# Altium PCB PCB_CONTROL.PcbDoc (part 7 of 15)
Units mil, origin at the board's own origin, x right, y up, seen from the top; angles counter-clockwise.
Board outline 7360.03 x 4773.15 mil, 2 copper layers (Top Layer, Bottom Layer); 73 components, 135 nets, 396 pads, 106 vias.
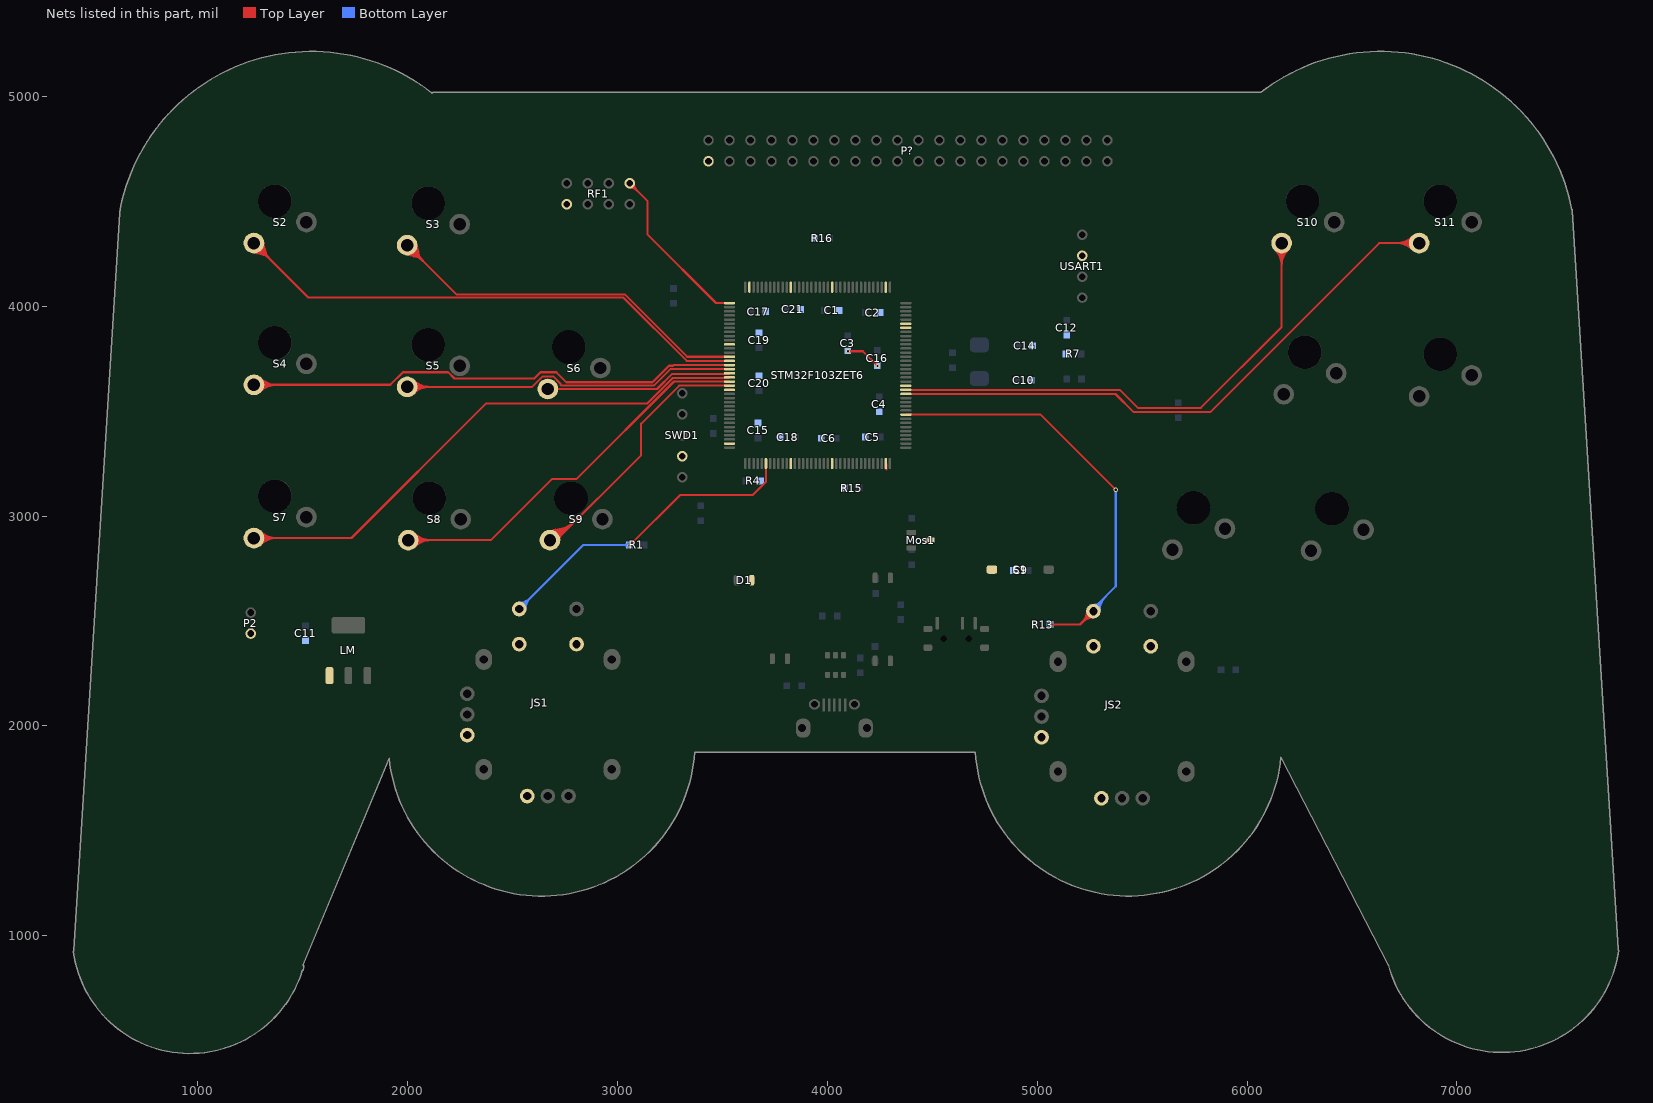
[diagram p7: the nets of this part, all layers, seen from the top]

## Via types
v1: diameter 20, hole 10, Top Layer to Bottom Layer, 104 vias
v2: diameter 30, hole 20, Top Layer to Bottom Layer, 2 vias

## Nets (pads, with @x,y where several pads share a name; then routed paths per layer and width w, separated by ;. In a path a pad name is that pad's centre, name@x,y a point inside that pad or via, vN(x,y) a via of type N, cw(c..) or ccw(c..) an arc to the next point about the centre after c; other vN are vias at no path point) (continued)
GND: C1.2 C2.2 C3.2 C4.2 C5.2 C6.2 C9.2 C10.1 C11.1 C12.1 C14.1 C15.2 C16.2 C17.2 C18.2 C19.2 C20.2 C21.2 D1.2 JS1.3 JS1.4 JS1.8 JS1.10 JS2.3 JS2.4 JS2.8 JS2.10 LM.1 Mos1.D P2.1 P?.1 R4.2 R7.1 R15.2 R16.2 RF1.1 S1.2 STM32F103ZET6.16 STM32F103ZET6.30 STM32F103ZET6.31 STM32F103ZET6.38 STM32F103ZET6.51 STM32F103ZET6.61 STM32F103ZET6.71 STM32F103ZET6.83 STM32F103ZET6.94 STM32F103ZET6.107 STM32F103ZET6.120 STM32F103ZET6.130 STM32F103ZET6.143 SWD1.4 USART1.2 | length 450.2
  Top Layer w10: v1(4100,3785) 4170,3785 v1(4240,3715) ; STM32F103ZET6.143@4279.8,3250 4282.49,3247.32 4282.49,3221.96 ; v1@4103.54,3781.46 cw(c4112.07,3772.93) 4112.07,3785 ; v1@4103.54,3781.46 cw(c4112.07,3772.93) 4112.07,3785 ; v1@4103.54,3781.46 cw(c4112.07,3772.93) 4112.07,3785 ; v1@4103.54,3781.46 cw(c4112.07,3772.93) 4112.07,3785 ; v1@4103.54,3788.54 ccw(c4112.07,3797.07) 4112.07,3785 ; v1@4103.54,3788.54 ccw(c4112.07,3797.07) 4112.07,3785 ; v1@4103.54,3788.54 ccw(c4112.07,3797.07) 4112.07,3785 ; v1@4103.54,3788.54 ccw(c4112.07,3797.07) 4112.07,3785 ; 4231.46,3723.54 cw(c4222.93,3715) v1@4235,3715 ; 4231.46,3723.54 ccw(c4240,3732.07) v1@4240,3720 ; 4231.46,3723.54 ccw(c4240,3732.07) v1@4240,3720 ; 4231.46,3723.54 cw(c4222.93,3715) v1@4235,3715 ; 4231.46,3723.54 ccw(c4240,3732.07) v1@4240,3720 ; 4231.46,3723.54 cw(c4222.93,3715) v1@4235,3715 ; 4231.46,3723.54 ccw(c4240,3732.07) v1@4240,3720 ; 4231.46,3723.54 cw(c4222.93,3715) v1@4235,3715 ; STM32F103ZET6.143@4279.19,3228.21 cw(c4273.94,3221.46) 4282.49,3221.46 ; STM32F103ZET6.143@4279.19,3228.21 cw(c4273.94,3221.46) 4282.49,3221.46 ; STM32F103ZET6.143@4279.19,3228.21 cw(c4273.94,3221.46) 4282.49,3221.46 ; STM32F103ZET6.143@4279.19,3228.21 cw(c4273.94,3221.46) 4282.49,3221.46 ; STM32F103ZET6.143@4279.19,3228.21 cw(c4273.94,3221.46) 4282.49,3221.46 ; STM32F103ZET6.143@4279.19,3228.21 cw(c4273.94,3221.46) 4282.49,3221.46 ; STM32F103ZET6.143@4279.19,3228.21 cw(c4273.94,3221.46) 4282.49,3221.46 ; STM32F103ZET6.143@4279.19,3228.21 cw(c4273.94,3221.46) 4282.49,3221.46 ; STM32F103ZET6.143@4279.19,3228.21 cw(c4273.94,3221.46) 4282.49,3221.46 ; STM32F103ZET6.143@4279.19,3228.21 cw(c4273.94,3221.46) 4282.49,3221.46 ; STM32F103ZET6.143@4279.8,3229 4282.49,3221.96 ; STM32F103ZET6.143@4279.8,3229 4282.49,3221.96 ; STM32F103ZET6.143@4279.8,3229 4282.49,3221.96
IRQ: RF1.8 STM32F103ZET6.73 | length 1572.8
  Top Layer w10: STM32F103ZET6.73@3535,4014.49 3470.51,4014.49 3145,4340 3145,4500 RF1.8@3060,4585 ; RF1.8@3060,4565 cw(c3060,4516.72) 3094.14,4550.86 ; RF1.8@3060,4565 cw(c3060,4516.72) 3094.14,4550.86 ; RF1.8@3060,4565 cw(c3060,4516.72) 3094.14,4550.86 ; RF1.8@3060,4565 cw(c3060,4516.72) 3094.14,4550.86 ; RF1.8@3060,4585 ccw(c3094.24,4592.01) 3085.2,4558.25 ; RF1.8@3060,4585 cw(c3052.99,4550.76) 3086.75,4559.8 ; RF1.8@3060,4585 ccw(c3094.24,4592.01) 3085.2,4558.25 ; RF1.8@3060,4585 cw(c3052.99,4550.76) 3086.75,4559.8 ; RF1.8@3060,4585 ccw(c3094.24,4592.01) 3085.2,4558.25 ; RF1.8@3060,4585 cw(c3052.99,4550.76) 3086.75,4559.8 ; RF1.8@3060,4585 ccw(c3094.24,4592.01) 3085.2,4558.25 ; RF1.8@3060,4585 cw(c3052.99,4550.76) 3086.75,4559.8 ; RF1.8@3060,4585 ccw(c3094.24,4592.01) 3085.2,4558.25 ; RF1.8@3060,4585 cw(c3052.99,4550.76) 3086.75,4559.8 ; RF1.8@3060,4585 ccw(c3094.24,4592.01) 3085.2,4558.25 ; RF1.8@3060,4585 cw(c3052.99,4550.76) 3086.75,4559.8 ; RF1.8@3080,4585 ccw(c3128.28,4585) 3094.14,4550.86 ; RF1.8@3080,4585 ccw(c3128.28,4585) 3094.14,4550.86 ; RF1.8@3080,4585 ccw(c3128.28,4585) 3094.14,4550.86 ; RF1.8@3080,4585 ccw(c3128.28,4585) 3094.14,4550.86
JOY_LEFT_KEY: JS2.9 R13.1 STM32F103ZET6.9 | length 2464
  Top Layer w10: STM32F103ZET6.9@4375,3482.99 5017.01,3482.99 v1(5375,3125) ; v1(5062,2483) 5204.46,2483 JS2.9@5268.43,2546.97 ; v1@5065.54,2479.46 cw(c5074.07,2470.93) 5074.07,2483 cw(c5074.07,2495.07) v1@5065.54,2486.54 ; JS2.9@5238.43,2546.97 cw(c5166,2546.97) 5217.21,2495.76 cw(c5268.43,2444.54) JS2.9@5268.43,2516.97 ; JS2.9@5248.43,2546.97 cw(c5200.14,2546.97) 5234.28,2512.83 cw(c5268.43,2478.68) JS2.9@5268.43,2526.97 ; v1@5370,3125 ccw(c5357.93,3125) 5366.46,3133.54 ccw(c5375,3142.07) v1@5375,3130
  Bottom Layer w10: JS2.9@5268.43,2546.97 5268.43,2558.43 5375,2665 v1(5375,3125) ; JS2.9@5268.43,2576.97 ccw(c5268.43,2621.74) 5300.08,2590.08 ; JS2.9@5278.43,2546.97 cw(c5330.23,2546.97) 5293.6,2583.6 ; JS2.9@5288.43,2546.97 cw(c5364.37,2546.97) 5310.67,2600.67 ; JS2.9@5298.43,2546.97 cw(c5398.51,2546.97) 5327.74,2617.74 ; v1@5371.46,3121.46 cw(c5362.93,3112.93) 5375,3112.93 cw(c5387.07,3112.93) v1@5378.54,3121.46
JOY_RIGHT_KEY: JS1.9 R1.1 STM32F103ZET6.114 | length 1776.9
  Top Layer w10: v1(3060,2860) 3300,3100 3645,3100 3708.94,3163.94 STM32F103ZET6.114@3708.94,3250 ; v1@3060,2865 ccw(c3060,2877.07) 3068.54,2868.54 ccw(c3077.07,2860) v1@3065,2860
  Bottom Layer w10: JS1.9@2533.43,2556.97 2838.46,2862 R1.1@3058,2862 ; JS1.9@2533.43,2576.97 ccw(c2533.43,2625.25) 2567.57,2591.11 ccw(c2601.71,2556.97) JS1.9@2553.43,2556.97 ; JS1.9@2533.43,2586.97 ccw(c2533.43,2659.39) 2584.64,2608.18 ccw(c2635.85,2556.97) JS1.9@2563.43,2556.97 ; R1.1@3043.1,2862 cw(c3043.1,2843.1) R1.1@3056.46,2856.46 ; R1.1@3050.22,2854.22 ccw(c3031.44,2835.44) 3031.44,2862 ccw(c3031.44,2888.56) R1.1@3050.22,2869.78
KEY_1: S2.2 STM32F103ZET6.87 | length 8074.4
  Top Layer w10: S2.2@1270,4300 1530,4040 3030,4040 3331.1,3738.9 STM32F103ZET6.87@3535,3738.9 ; S2.2@1244.74,4294.83 ccw(c1299.99,4306.14) 1285.39,4251.66 ; S2.2@1244.74,4294.83 ccw(c1299.99,4306.14) 1285.39,4251.66 ; S2.2@1244.74,4294.83 ccw(c1299.99,4306.14) 1285.39,4251.66 ; S2.2@1244.74,4294.83 ccw(c1299.99,4306.14) 1285.39,4251.66 ; S2.2@1244.74,4294.83 ccw(c1299.99,4306.14) 1285.39,4251.66 ; S2.2@1244.74,4294.83 ccw(c1299.99,4306.14) 1285.39,4251.66 ; S2.2@1254.53,4296.83 ccw(c1317.72,4309.77) 1301.02,4247.47 ; S2.2@1254.53,4296.83 ccw(c1317.72,4309.77) 1301.02,4247.47 ; S2.2@1254.53,4296.83 ccw(c1317.72,4309.77) 1301.02,4247.47 ; S2.2@1254.53,4296.83 ccw(c1317.72,4309.77) 1301.02,4247.47 ; S2.2@1254.53,4296.83 ccw(c1317.72,4309.77) 1301.02,4247.47 ; S2.2@1254.53,4296.83 ccw(c1317.72,4309.77) 1301.02,4247.47 ; S2.2@1264.23,4299.57 ccw(c1310.57,4303.03) 1298.54,4258.14 ; S2.2@1264.23,4299.57 ccw(c1310.57,4303.03) 1298.54,4258.14 ; S2.2@1264.23,4299.57 ccw(c1310.57,4303.03) 1298.54,4258.14 ; S2.2@1264.23,4299.57 ccw(c1310.57,4303.03) 1298.54,4258.14 ; S2.2@1264.23,4299.57 ccw(c1310.57,4303.03) 1298.54,4258.14 ; S2.2@1264.23,4299.57 ccw(c1310.57,4303.03) 1298.54,4258.14 ; S2.2@1264.33,4298.84 ccw(c1335.44,4313.4) 1316.66,4243.29 ; S2.2@1264.33,4298.84 ccw(c1335.44,4313.4) 1316.66,4243.29 ; S2.2@1264.33,4298.84 ccw(c1335.44,4313.4) 1316.66,4243.29 ; S2.2@1264.33,4298.84 ccw(c1335.44,4313.4) 1316.66,4243.29 ; S2.2@1264.33,4298.84 ccw(c1335.44,4313.4) 1316.66,4243.29 ; S2.2@1264.33,4298.84 ccw(c1335.44,4313.4) 1316.66,4243.29 ; S2.2@1269.69,4295.8 cw(c1265.86,4244.55) 1315.51,4257.85 ; S2.2@1269.69,4295.8 cw(c1265.86,4244.55) 1315.51,4257.85 ; S2.2@1269.69,4295.8 cw(c1265.86,4244.55) 1315.51,4257.85 ; S2.2@1269.69,4295.8 cw(c1265.86,4244.55) 1315.51,4257.85 ; S2.2@1269.69,4295.8 cw(c1265.86,4244.55) 1315.51,4257.85 ; S2.2@1269.69,4295.8 cw(c1265.86,4244.55) 1315.51,4257.85 ; S2.2@1270,4255.79 cw(c1270,4149.05) 1345.48,4224.52 ; S2.2@1270,4255.79 cw(c1270,4149.05) 1345.48,4224.52 ; S2.2@1270,4255.79 cw(c1270,4149.05) 1345.48,4224.52 ; S2.2@1270,4255.79 cw(c1270,4149.05) 1345.48,4224.52 ; S2.2@1270,4265.79 cw(c1270,4183.19) 1328.4,4241.6 ; S2.2@1270,4265.79 cw(c1270,4183.19) 1328.4,4241.6 ; S2.2@1270,4265.79 cw(c1270,4183.19) 1328.4,4241.6 ; S2.2@1270,4265.79 cw(c1270,4183.19) 1328.4,4241.6 ; S2.2@1270,4275.79 cw(c1270,4217.33) 1311.33,4258.67 ; S2.2@1270,4275.79 cw(c1270,4217.33) 1311.33,4258.67 ; S2.2@1270,4275.79 cw(c1270,4217.33) 1311.33,4258.67 ; S2.2@1270,4275.79 cw(c1270,4217.33) 1311.33,4258.67 ; S2.2@1270.43,4305.77 cw(c1266.97,4259.43) 1311.86,4271.46 ; S2.2@1270.43,4305.77 cw(c1266.97,4259.43) 1311.86,4271.46 ; S2.2@1270.43,4305.77 cw(c1266.97,4259.43) 1311.86,4271.46 ; S2.2@1270.43,4305.77 cw(c1266.97,4259.43) 1311.86,4271.46 ; S2.2@1270.43,4305.77 cw(c1266.97,4259.43) 1311.86,4271.46 ; S2.2@1270.43,4305.77 cw(c1266.97,4259.43) 1311.86,4271.46 ; S2.2@1271.16,4305.67 cw(c1256.6,4234.56) 1326.71,4253.34 ; S2.2@1271.16,4305.67 cw(c1256.6,4234.56) 1326.71,4253.34 ; S2.2@1271.16,4305.67 cw(c1256.6,4234.56) 1326.71,4253.34 ; S2.2@1271.16,4305.67 cw(c1256.6,4234.56) 1326.71,4253.34 ; S2.2@1271.16,4305.67 cw(c1256.6,4234.56) 1326.71,4253.34 ; S2.2@1271.16,4305.67 cw(c1256.6,4234.56) 1326.71,4253.34 ; S2.2@1273.17,4315.47 cw(c1260.23,4252.28) 1322.53,4268.98 ; S2.2@1273.17,4315.47 cw(c1260.23,4252.28) 1322.53,4268.98 ; S2.2@1273.17,4315.47 cw(c1260.23,4252.28) 1322.53,4268.98 ; S2.2@1273.17,4315.47 cw(c1260.23,4252.28) 1322.53,4268.98 ; S2.2@1273.17,4315.47 cw(c1260.23,4252.28) 1322.53,4268.98 ; S2.2@1273.17,4315.47 cw(c1260.23,4252.28) 1322.53,4268.98 ; S2.2@1274.2,4300.31 ccw(c1325.45,4304.14) 1312.15,4254.49 ; S2.2@1274.2,4300.31 ccw(c1325.45,4304.14) 1312.15,4254.49 ; S2.2@1274.2,4300.31 ccw(c1325.45,4304.14) 1312.15,4254.49 ; S2.2@1274.2,4300.31 ccw(c1325.45,4304.14) 1312.15,4254.49 ; S2.2@1274.2,4300.31 ccw(c1325.45,4304.14) 1312.15,4254.49 ; S2.2@1274.2,4300.31 ccw(c1325.45,4304.14) 1312.15,4254.49 ; S2.2@1275.17,4325.26 cw(c1263.86,4270.01) 1318.34,4284.61 ; S2.2@1275.17,4325.26 cw(c1263.86,4270.01) 1318.34,4284.61 ; S2.2@1275.17,4325.26 cw(c1263.86,4270.01) 1318.34,4284.61 ; S2.2@1275.17,4325.26 cw(c1263.86,4270.01) 1318.34,4284.61 ; S2.2@1275.17,4325.26 cw(c1263.86,4270.01) 1318.34,4284.61 ; S2.2@1275.17,4325.26 cw(c1263.86,4270.01) 1318.34,4284.61 ; S2.2@1294.21,4300 ccw(c1352.67,4300) 1311.33,4258.67 ; S2.2@1294.21,4300 ccw(c1352.67,4300) 1311.33,4258.67 ; S2.2@1294.21,4300 ccw(c1352.67,4300) 1311.33,4258.67 ; S2.2@1294.21,4300 ccw(c1352.67,4300) 1311.33,4258.67 ; S2.2@1304.21,4300 ccw(c1386.81,4300) 1328.4,4241.6 ; S2.2@1304.21,4300 ccw(c1386.81,4300) 1328.4,4241.6 ; S2.2@1304.21,4300 ccw(c1386.81,4300) 1328.4,4241.6 ; S2.2@1304.21,4300 ccw(c1386.81,4300) 1328.4,4241.6 ; S2.2@1314.21,4300 ccw(c1420.95,4300) 1345.48,4224.52 ; S2.2@1314.21,4300 ccw(c1420.95,4300) 1345.48,4224.52 ; S2.2@1314.21,4300 ccw(c1420.95,4300) 1345.48,4224.52 ; S2.2@1314.21,4300 ccw(c1420.95,4300) 1345.48,4224.52
KEY_2: S3.2 STM32F103ZET6.86 | length 7332.1
  Top Layer w10: S3.2@2000,4290 2234,4056 3036.63,4056 3334.05,3758.58 STM32F103ZET6.86@3535,3758.58 ; S3.2@1974.74,4284.83 ccw(c2029.99,4296.14) 2015.39,4241.66 ; S3.2@1974.74,4284.83 ccw(c2029.99,4296.14) 2015.39,4241.66 ; S3.2@1974.74,4284.83 ccw(c2029.99,4296.14) 2015.39,4241.66 ; S3.2@1974.74,4284.83 ccw(c2029.99,4296.14) 2015.39,4241.66 ; S3.2@1974.74,4284.83 ccw(c2029.99,4296.14) 2015.39,4241.66 ; S3.2@1974.74,4284.83 ccw(c2029.99,4296.14) 2015.39,4241.66 ; S3.2@1984.53,4286.83 ccw(c2047.72,4299.77) 2031.02,4237.47 ; S3.2@1984.53,4286.83 ccw(c2047.72,4299.77) 2031.02,4237.47 ; S3.2@1984.53,4286.83 ccw(c2047.72,4299.77) 2031.02,4237.47 ; S3.2@1984.53,4286.83 ccw(c2047.72,4299.77) 2031.02,4237.47 ; S3.2@1984.53,4286.83 ccw(c2047.72,4299.77) 2031.02,4237.47 ; S3.2@1984.53,4286.83 ccw(c2047.72,4299.77) 2031.02,4237.47 ; S3.2@1994.23,4289.57 ccw(c2040.57,4293.03) 2028.54,4248.14 ; S3.2@1994.23,4289.57 ccw(c2040.57,4293.03) 2028.54,4248.14 ; S3.2@1994.23,4289.57 ccw(c2040.57,4293.03) 2028.54,4248.14 ; S3.2@1994.23,4289.57 ccw(c2040.57,4293.03) 2028.54,4248.14 ; S3.2@1994.23,4289.57 ccw(c2040.57,4293.03) 2028.54,4248.14 ; S3.2@1994.23,4289.57 ccw(c2040.57,4293.03) 2028.54,4248.14 ; S3.2@1994.33,4288.84 ccw(c2065.44,4303.4) 2046.66,4233.29 ; S3.2@1994.33,4288.84 ccw(c2065.44,4303.4) 2046.66,4233.29 ; S3.2@1994.33,4288.84 ccw(c2065.44,4303.4) 2046.66,4233.29 ; S3.2@1994.33,4288.84 ccw(c2065.44,4303.4) 2046.66,4233.29 ; S3.2@1994.33,4288.84 ccw(c2065.44,4303.4) 2046.66,4233.29 ; S3.2@1994.33,4288.84 ccw(c2065.44,4303.4) 2046.66,4233.29 ; S3.2@1999.69,4285.8 cw(c1995.86,4234.55) 2045.51,4247.85 ; S3.2@1999.69,4285.8 cw(c1995.86,4234.55) 2045.51,4247.85 ; S3.2@1999.69,4285.8 cw(c1995.86,4234.55) 2045.51,4247.85 ; S3.2@1999.69,4285.8 cw(c1995.86,4234.55) 2045.51,4247.85 ; S3.2@1999.69,4285.8 cw(c1995.86,4234.55) 2045.51,4247.85 ; S3.2@1999.69,4285.8 cw(c1995.86,4234.55) 2045.51,4247.85 ; S3.2@2000,4245.79 cw(c2000,4139.05) 2075.48,4214.52 ; S3.2@2000,4245.79 cw(c2000,4139.05) 2075.48,4214.52 ; S3.2@2000,4245.79 cw(c2000,4139.05) 2075.48,4214.52 ; S3.2@2000,4245.79 cw(c2000,4139.05) 2075.48,4214.52 ; S3.2@2000,4255.79 cw(c2000,4173.19) 2058.4,4231.6 ; S3.2@2000,4255.79 cw(c2000,4173.19) 2058.4,4231.6 ; S3.2@2000,4255.79 cw(c2000,4173.19) 2058.4,4231.6 ; S3.2@2000,4255.79 cw(c2000,4173.19) 2058.4,4231.6 ; S3.2@2000,4265.79 cw(c2000,4207.33) 2041.33,4248.67 ; S3.2@2000,4265.79 cw(c2000,4207.33) 2041.33,4248.67 ; S3.2@2000,4265.79 cw(c2000,4207.33) 2041.33,4248.67 ; S3.2@2000,4265.79 cw(c2000,4207.33) 2041.33,4248.67 ; S3.2@2000.43,4295.77 cw(c1996.97,4249.43) 2041.86,4261.46 ; S3.2@2000.43,4295.77 cw(c1996.97,4249.43) 2041.86,4261.46 ; S3.2@2000.43,4295.77 cw(c1996.97,4249.43) 2041.86,4261.46 ; S3.2@2000.43,4295.77 cw(c1996.97,4249.43) 2041.86,4261.46 ; S3.2@2000.43,4295.77 cw(c1996.97,4249.43) 2041.86,4261.46 ; S3.2@2000.43,4295.77 cw(c1996.97,4249.43) 2041.86,4261.46 ; S3.2@2001.16,4295.67 cw(c1986.6,4224.56) 2056.71,4243.34 ; S3.2@2001.16,4295.67 cw(c1986.6,4224.56) 2056.71,4243.34 ; S3.2@2001.16,4295.67 cw(c1986.6,4224.56) 2056.71,4243.34 ; S3.2@2001.16,4295.67 cw(c1986.6,4224.56) 2056.71,4243.34 ; S3.2@2001.16,4295.67 cw(c1986.6,4224.56) 2056.71,4243.34 ; S3.2@2001.16,4295.67 cw(c1986.6,4224.56) 2056.71,4243.34 ; S3.2@2003.17,4305.47 cw(c1990.23,4242.28) 2052.53,4258.98 ; S3.2@2003.17,4305.47 cw(c1990.23,4242.28) 2052.53,4258.98 ; S3.2@2003.17,4305.47 cw(c1990.23,4242.28) 2052.53,4258.98 ; S3.2@2003.17,4305.47 cw(c1990.23,4242.28) 2052.53,4258.98 ; S3.2@2003.17,4305.47 cw(c1990.23,4242.28) 2052.53,4258.98 ; S3.2@2003.17,4305.47 cw(c1990.23,4242.28) 2052.53,4258.98 ; S3.2@2004.2,4290.31 ccw(c2055.45,4294.14) 2042.15,4244.49 ; S3.2@2004.2,4290.31 ccw(c2055.45,4294.14) 2042.15,4244.49 ; S3.2@2004.2,4290.31 ccw(c2055.45,4294.14) 2042.15,4244.49 ; S3.2@2004.2,4290.31 ccw(c2055.45,4294.14) 2042.15,4244.49 ; S3.2@2004.2,4290.31 ccw(c2055.45,4294.14) 2042.15,4244.49 ; S3.2@2004.2,4290.31 ccw(c2055.45,4294.14) 2042.15,4244.49 ; S3.2@2005.17,4315.26 cw(c1993.86,4260.01) 2048.34,4274.61 ; S3.2@2005.17,4315.26 cw(c1993.86,4260.01) 2048.34,4274.61 ; S3.2@2005.17,4315.26 cw(c1993.86,4260.01) 2048.34,4274.61 ; S3.2@2005.17,4315.26 cw(c1993.86,4260.01) 2048.34,4274.61 ; S3.2@2005.17,4315.26 cw(c1993.86,4260.01) 2048.34,4274.61 ; S3.2@2005.17,4315.26 cw(c1993.86,4260.01) 2048.34,4274.61 ; S3.2@2024.21,4290 ccw(c2082.67,4290) 2041.33,4248.67 ; S3.2@2024.21,4290 ccw(c2082.67,4290) 2041.33,4248.67 ; S3.2@2024.21,4290 ccw(c2082.67,4290) 2041.33,4248.67 ; S3.2@2024.21,4290 ccw(c2082.67,4290) 2041.33,4248.67 ; S3.2@2034.21,4290 ccw(c2116.81,4290) 2058.4,4231.6 ; S3.2@2034.21,4290 ccw(c2116.81,4290) 2058.4,4231.6 ; S3.2@2034.21,4290 ccw(c2116.81,4290) 2058.4,4231.6 ; S3.2@2034.21,4290 ccw(c2116.81,4290) 2058.4,4231.6 ; S3.2@2044.21,4290 ccw(c2150.95,4290) 2075.48,4214.52 ; S3.2@2044.21,4290 ccw(c2150.95,4290) 2075.48,4214.52 ; S3.2@2044.21,4290 ccw(c2150.95,4290) 2075.48,4214.52 ; S3.2@2044.21,4290 ccw(c2150.95,4290) 2075.48,4214.52
KEY_3: S4.2 STM32F103ZET6.88 | length 3925.7
  Top Layer w10: S4.2@1270,3625 1920,3625 1980,3685 2194.85,3685 2225.06,3654.79 2274.94,3654.79 2275.15,3655 2605,3655 2635,3685 2710,3685 2758,3637 3168.37,3637 3246.9,3715.53 3265.53,3715.53 3269.21,3719.21 STM32F103ZET6.88@3535,3719.21 ; S4.2@1287.12,3607.88 cw(c1328.45,3566.55) 1328.45,3625 ; S4.2@1287.12,3607.88 cw(c1328.45,3566.55) 1328.45,3625 ; S4.2@1287.12,3607.88 cw(c1328.45,3566.55) 1328.45,3625 ; S4.2@1287.12,3607.88 cw(c1328.45,3566.55) 1328.45,3625 ; S4.2@1287.12,3642.12 ccw(c1328.45,3683.45) 1328.45,3625 ; S4.2@1287.12,3642.12 ccw(c1328.45,3683.45) 1328.45,3625 ; S4.2@1287.12,3642.12 ccw(c1328.45,3683.45) 1328.45,3625 ; S4.2@1287.12,3642.12 ccw(c1328.45,3683.45) 1328.45,3625 ; S4.2@1294.19,3600.81 cw(c1352.6,3542.4) 1352.6,3625 ; S4.2@1294.19,3600.81 cw(c1352.6,3542.4) 1352.6,3625 ; S4.2@1294.19,3600.81 cw(c1352.6,3542.4) 1352.6,3625 ; S4.2@1294.19,3600.81 cw(c1352.6,3542.4) 1352.6,3625 ; S4.2@1294.19,3649.19 ccw(c1352.6,3707.6) 1352.6,3625 ; S4.2@1294.19,3649.19 ccw(c1352.6,3707.6) 1352.6,3625 ; S4.2@1294.19,3649.19 ccw(c1352.6,3707.6) 1352.6,3625 ; S4.2@1294.19,3649.19 ccw(c1352.6,3707.6) 1352.6,3625 ; S4.2@1301.26,3593.74 cw(c1376.74,3518.26) 1376.74,3625 ; S4.2@1301.26,3593.74 cw(c1376.74,3518.26) 1376.74,3625 ; S4.2@1301.26,3593.74 cw(c1376.74,3518.26) 1376.74,3625 ; S4.2@1301.26,3593.74 cw(c1376.74,3518.26) 1376.74,3625 ; S4.2@1301.26,3656.26 ccw(c1376.74,3731.74) 1376.74,3625 ; S4.2@1301.26,3656.26 ccw(c1376.74,3731.74) 1376.74,3625 ; S4.2@1301.26,3656.26 ccw(c1376.74,3731.74) 1376.74,3625 ; S4.2@1301.26,3656.26 ccw(c1376.74,3731.74) 1376.74,3625
KEY_4: S5.2 STM32F103ZET6.89 | length 3166
  Top Layer w10: S5.2@2000,3615 2594.85,3615 2645.06,3665.21 2694.94,3665.21 2730.21,3629.94 2730.21,3625.79 2735,3621 3175,3621 3253.53,3699.53 STM32F103ZET6.89@3535,3699.53 ; S5.2@2017.12,3597.88 cw(c2058.45,3556.55) 2058.45,3615 ; S5.2@2017.12,3597.88 cw(c2058.45,3556.55) 2058.45,3615 ; S5.2@2017.12,3597.88 cw(c2058.45,3556.55) 2058.45,3615 ; S5.2@2017.12,3597.88 cw(c2058.45,3556.55) 2058.45,3615 ; S5.2@2017.12,3632.12 ccw(c2058.45,3673.45) 2058.45,3615 ; S5.2@2017.12,3632.12 ccw(c2058.45,3673.45) 2058.45,3615 ; S5.2@2017.12,3632.12 ccw(c2058.45,3673.45) 2058.45,3615 ; S5.2@2017.12,3632.12 ccw(c2058.45,3673.45) 2058.45,3615 ; S5.2@2024.19,3590.81 cw(c2082.6,3532.4) 2082.6,3615 ; S5.2@2024.19,3590.81 cw(c2082.6,3532.4) 2082.6,3615 ; S5.2@2024.19,3590.81 cw(c2082.6,3532.4) 2082.6,3615 ; S5.2@2024.19,3590.81 cw(c2082.6,3532.4) 2082.6,3615 ; S5.2@2024.19,3639.19 ccw(c2082.6,3697.6) 2082.6,3615 ; S5.2@2024.19,3639.19 ccw(c2082.6,3697.6) 2082.6,3615 ; S5.2@2024.19,3639.19 ccw(c2082.6,3697.6) 2082.6,3615 ; S5.2@2024.19,3639.19 ccw(c2082.6,3697.6) 2082.6,3615 ; S5.2@2031.26,3583.74 cw(c2106.74,3508.26) 2106.74,3615 ; S5.2@2031.26,3583.74 cw(c2106.74,3508.26) 2106.74,3615 ; S5.2@2031.26,3583.74 cw(c2106.74,3508.26) 2106.74,3615 ; S5.2@2031.26,3583.74 cw(c2106.74,3508.26) 2106.74,3615 ; S5.2@2031.26,3646.26 ccw(c2106.74,3721.74) 2106.74,3615 ; S5.2@2031.26,3646.26 ccw(c2106.74,3721.74) 2106.74,3615 ; S5.2@2031.26,3646.26 ccw(c2106.74,3721.74) 2106.74,3615 ; S5.2@2031.26,3646.26 ccw(c2106.74,3721.74) 2106.74,3615
KEY_5: S6.2 STM32F103ZET6.90 | length 932.4
  Top Layer w10: S6.2@2670,3605 3189.75,3605 3261.9,3677.16 3532.32,3677.16 STM32F103ZET6.90@3535,3679.84 ; 3505.1,3677.16 ccw(c3505.1,3688.74) STM32F103ZET6.90@3513.29,3680.55 ; 3505.1,3677.16 ccw(c3505.1,3688.74) STM32F103ZET6.90@3513.29,3680.55 ; 3505.1,3677.16 ccw(c3505.1,3688.74) STM32F103ZET6.90@3513.29,3680.55 ; 3505.1,3677.16 ccw(c3505.1,3688.74) STM32F103ZET6.90@3513.29,3680.55
KEY_6: S7.2 STM32F103ZET6.91 | length 4175.2
  Top Layer w10: S7.2@1270,2895 1735,2895 2375,3535 3142.37,3535 3264.84,3657.47 3532.32,3657.47 STM32F103ZET6.91@3535,3660.16 ; S7.2@1287.12,2877.88 cw(c1328.45,2836.55) 1328.45,2895 ; S7.2@1287.12,2877.88 cw(c1328.45,2836.55) 1328.45,2895 ; S7.2@1287.12,2877.88 cw(c1328.45,2836.55) 1328.45,2895 ; S7.2@1287.12,2877.88 cw(c1328.45,2836.55) 1328.45,2895 ; S7.2@1287.12,2912.12 ccw(c1328.45,2953.45) 1328.45,2895 ; S7.2@1287.12,2912.12 ccw(c1328.45,2953.45) 1328.45,2895 ; S7.2@1287.12,2912.12 ccw(c1328.45,2953.45) 1328.45,2895 ; S7.2@1287.12,2912.12 ccw(c1328.45,2953.45) 1328.45,2895 ; S7.2@1294.19,2870.81 cw(c1352.6,2812.4) 1352.6,2895 ; S7.2@1294.19,2870.81 cw(c1352.6,2812.4) 1352.6,2895 ; S7.2@1294.19,2870.81 cw(c1352.6,2812.4) 1352.6,2895 ; S7.2@1294.19,2870.81 cw(c1352.6,2812.4) 1352.6,2895 ; S7.2@1294.19,2919.19 ccw(c1352.6,2977.6) 1352.6,2895 ; S7.2@1294.19,2919.19 ccw(c1352.6,2977.6) 1352.6,2895 ; S7.2@1294.19,2919.19 ccw(c1352.6,2977.6) 1352.6,2895 ; S7.2@1294.19,2919.19 ccw(c1352.6,2977.6) 1352.6,2895 ; S7.2@1301.26,2863.74 cw(c1376.74,2788.26) 1376.74,2895 ; S7.2@1301.26,2863.74 cw(c1376.74,2788.26) 1376.74,2895 ; S7.2@1301.26,2863.74 cw(c1376.74,2788.26) 1376.74,2895 ; S7.2@1301.26,2863.74 cw(c1376.74,2788.26) 1376.74,2895 ; S7.2@1301.26,2926.26 ccw(c1376.74,3001.74) 1376.74,2895 ; S7.2@1301.26,2926.26 ccw(c1376.74,3001.74) 1376.74,2895 ; S7.2@1301.26,2926.26 ccw(c1376.74,3001.74) 1376.74,2895 ; S7.2@1301.26,2926.26 ccw(c1376.74,3001.74) 1376.74,2895 ; 3505.1,3657.47 ccw(c3505.1,3669.05) STM32F103ZET6.91@3513.29,3660.86 ; 3505.1,3657.47 ccw(c3505.1,3669.05) STM32F103ZET6.91@3513.29,3660.86 ; 3505.1,3657.47 ccw(c3505.1,3669.05) STM32F103ZET6.91@3513.29,3660.86 ; 3505.1,3657.47 ccw(c3505.1,3669.05) STM32F103ZET6.91@3513.29,3660.86
KEY_7: S8.2 STM32F103ZET6.92 | length 3399.8
  Top Layer w10: S8.2@2005,2885 2398,2885 2689,3176 2806,3176 3270.47,3640.47 STM32F103ZET6.92@3535,3640.47 ; S8.2@2022.12,2867.88 cw(c2063.45,2826.55) 2063.45,2885 ; S8.2@2022.12,2867.88 cw(c2063.45,2826.55) 2063.45,2885 ; S8.2@2022.12,2867.88 cw(c2063.45,2826.55) 2063.45,2885 ; S8.2@2022.12,2867.88 cw(c2063.45,2826.55) 2063.45,2885 ; S8.2@2022.12,2902.12 ccw(c2063.45,2943.45) 2063.45,2885 ; S8.2@2022.12,2902.12 ccw(c2063.45,2943.45) 2063.45,2885 ; S8.2@2022.12,2902.12 ccw(c2063.45,2943.45) 2063.45,2885 ; S8.2@2022.12,2902.12 ccw(c2063.45,2943.45) 2063.45,2885 ; S8.2@2029.19,2860.81 cw(c2087.6,2802.4) 2087.6,2885 ; S8.2@2029.19,2860.81 cw(c2087.6,2802.4) 2087.6,2885 ; S8.2@2029.19,2860.81 cw(c2087.6,2802.4) 2087.6,2885 ; S8.2@2029.19,2860.81 cw(c2087.6,2802.4) 2087.6,2885 ; S8.2@2029.19,2909.19 ccw(c2087.6,2967.6) 2087.6,2885 ; S8.2@2029.19,2909.19 ccw(c2087.6,2967.6) 2087.6,2885 ; S8.2@2029.19,2909.19 ccw(c2087.6,2967.6) 2087.6,2885 ; S8.2@2029.19,2909.19 ccw(c2087.6,2967.6) 2087.6,2885 ; S8.2@2036.26,2853.74 cw(c2111.74,2778.26) 2111.74,2885 ; S8.2@2036.26,2853.74 cw(c2111.74,2778.26) 2111.74,2885 ; S8.2@2036.26,2853.74 cw(c2111.74,2778.26) 2111.74,2885 ; S8.2@2036.26,2853.74 cw(c2111.74,2778.26) 2111.74,2885 ; S8.2@2036.26,2916.26 ccw(c2111.74,2991.74) 2111.74,2885 ; S8.2@2036.26,2916.26 ccw(c2111.74,2991.74) 2111.74,2885 ; S8.2@2036.26,2916.26 ccw(c2111.74,2991.74) 2111.74,2885 ; S8.2@2036.26,2916.26 ccw(c2111.74,2991.74) 2111.74,2885
KEY_8: S9.2 STM32F103ZET6.93 | length 7922.3
  Top Layer w10: S9.2@2680,2885 2708.69,2885 3114,3290.31 3114,3439.91 3295.09,3621 3534.79,3621 STM32F103ZET6.93@3535,3620.79 ; S9.2@2656.9,2896.46 cw(c2721.03,2864.64) 2706.4,2934.73 ; S9.2@2656.9,2896.46 cw(c2721.03,2864.64) 2706.4,2934.73 ; S9.2@2656.9,2896.46 cw(c2721.03,2864.64) 2706.4,2934.73 ; S9.2@2656.9,2896.46 cw(c2721.03,2864.64) 2706.4,2934.73 ; S9.2@2656.9,2896.46 cw(c2721.03,2864.64) 2706.4,2934.73 ; S9.2@2656.9,2896.46 cw(c2721.03,2864.64) 2706.4,2934.73 ; S9.2@2665.86,2892.02 cw(c2744.49,2853.01) 2726.55,2938.93 ; S9.2@2665.86,2892.02 cw(c2744.49,2853.01) 2726.55,2938.93 ; S9.2@2665.86,2892.02 cw(c2744.49,2853.01) 2726.55,2938.93 ; S9.2@2665.86,2892.02 cw(c2744.49,2853.01) 2726.55,2938.93 ; S9.2@2665.86,2892.02 cw(c2744.49,2853.01) 2726.55,2938.93 ; S9.2@2665.86,2892.02 cw(c2744.49,2853.01) 2726.55,2938.93 ; S9.2@2674.52,2886.87 cw(c2738.16,2865.2) 2720.76,2930.13 ; S9.2@2674.52,2886.87 cw(c2738.16,2865.2) 2720.76,2930.13 ; S9.2@2674.52,2886.87 cw(c2738.16,2865.2) 2720.76,2930.13 ; S9.2@2674.52,2886.87 cw(c2738.16,2865.2) 2720.76,2930.13 ; S9.2@2674.52,2886.87 cw(c2738.16,2865.2) 2720.76,2930.13 ; S9.2@2674.52,2886.87 cw(c2738.16,2865.2) 2720.76,2930.13 ; S9.2@2674.82,2887.57 cw(c2767.95,2841.37) 2746.7,2943.14 ; S9.2@2674.82,2887.57 cw(c2767.95,2841.37) 2746.7,2943.14 ; S9.2@2674.82,2887.57 cw(c2767.95,2841.37) 2746.7,2943.14 ; S9.2@2674.82,2887.57 cw(c2767.95,2841.37) 2746.7,2943.14 ; S9.2@2674.82,2887.57 cw(c2767.95,2841.37) 2746.7,2943.14 ; S9.2@2674.82,2887.57 cw(c2767.95,2841.37) 2746.7,2943.14 ; S9.2@2678.8,2869.26 ccw(c2682.5,2917.93) 2729.65,2905.3 ; S9.2@2678.8,2869.26 ccw(c2682.5,2917.93) 2729.65,2905.3 ; S9.2@2678.8,2869.26 ccw(c2682.5,2917.93) 2729.65,2905.3 ; S9.2@2678.8,2869.26 ccw(c2682.5,2917.93) 2729.65,2905.3 ; S9.2@2678.8,2869.26 ccw(c2682.5,2917.93) 2729.65,2905.3 ; S9.2@2678.8,2869.26 ccw(c2682.5,2917.93) 2729.65,2905.3 ; S9.2@2680,2889.21 ccw(c2680,2968.65) 2736.17,2912.48 ; S9.2@2680,2889.21 ccw(c2680,2968.65) 2736.17,2912.48 ; S9.2@2680,2889.21 ccw(c2680,2968.65) 2736.17,2912.48 ; S9.2@2680,2889.21 ccw(c2680,2968.65) 2736.17,2912.48 ; S9.2@2680,2899.21 ccw(c2680,3002.8) 2753.25,2929.55 ; S9.2@2680,2899.21 ccw(c2680,3002.8) 2753.25,2929.55 ; S9.2@2680,2899.21 ccw(c2680,3002.8) 2753.25,2929.55 ; S9.2@2680,2899.21 ccw(c2680,3002.8) 2753.25,2929.55 ; S9.2@2680,2909.21 ccw(c2680,3036.94) 2770.32,2946.62 ; S9.2@2680,2909.21 ccw(c2680,3036.94) 2770.32,2946.62 ; S9.2@2680,2909.21 ccw(c2680,3036.94) 2770.32,2946.62 ; S9.2@2680,2909.21 ccw(c2680,3036.94) 2770.32,2946.62 ; S9.2@2680,2919.21 ccw(c2680,3071.08) 2787.39,2963.69 ; S9.2@2680,2919.21 ccw(c2680,3071.08) 2787.39,2963.69 ; S9.2@2680,2919.21 ccw(c2680,3071.08) 2787.39,2963.69 ; S9.2@2680,2919.21 ccw(c2680,3071.08) 2787.39,2963.69 ; S9.2@2680,2929.21 ccw(c2680,3105.22) 2804.46,2980.76 ; S9.2@2680,2929.21 ccw(c2680,3105.22) 2804.46,2980.76 ; S9.2@2680,2929.21 ccw(c2680,3105.22) 2804.46,2980.76 ; S9.2@2680,2929.21 ccw(c2680,3105.22) 2804.46,2980.76 ; S9.2@2683.99,2883.64 cw(c2759.5,2857.93) 2738.85,2934.98 ; S9.2@2683.99,2883.64 cw(c2759.5,2857.93) 2738.85,2934.98 ; S9.2@2683.99,2883.64 cw(c2759.5,2857.93) 2738.85,2934.98 ; S9.2@2683.99,2883.64 cw(c2759.5,2857.93) 2738.85,2934.98 ; S9.2@2683.99,2883.64 cw(c2759.5,2857.93) 2738.85,2934.98 ; S9.2@2683.99,2883.64 cw(c2759.5,2857.93) 2738.85,2934.98 ; S9.2@2684.1,2884.04 cw(c2730.91,2873.09) 2718.47,2919.52 ; S9.2@2684.1,2884.04 cw(c2730.91,2873.09) 2718.47,2919.52 ; S9.2@2684.1,2884.04 cw(c2730.91,2873.09) 2718.47,2919.52 ; S9.2@2684.1,2884.04 cw(c2730.91,2873.09) 2718.47,2919.52 ; S9.2@2684.1,2884.04 cw(c2730.91,2873.09) 2718.47,2919.52 ; S9.2@2684.1,2884.04 cw(c2730.91,2873.09) 2718.47,2919.52 ; S9.2@2693.45,2880.42 cw(c2780.83,2850.67) 2756.94,2939.83 ; S9.2@2693.45,2880.42 cw(c2780.83,2850.67) 2756.94,2939.83 ; S9.2@2693.45,2880.42 cw(c2780.83,2850.67) 2756.94,2939.83 ; S9.2@2693.45,2880.42 cw(c2780.83,2850.67) 2756.94,2939.83 ; S9.2@2693.45,2880.42 cw(c2780.83,2850.67) 2756.94,2939.83 ; S9.2@2693.45,2880.42 cw(c2780.83,2850.67) 2756.94,2939.83 ; S9.2@2693.84,2881.76 cw(c2749.35,2868.77) 2734.6,2923.84 ; S9.2@2693.84,2881.76 cw(c2749.35,2868.77) 2734.6,2923.84 ; S9.2@2693.84,2881.76 cw(c2749.35,2868.77) 2734.6,2923.84 ; S9.2@2693.84,2881.76 cw(c2749.35,2868.77) 2734.6,2923.84 ; S9.2@2693.84,2881.76 cw(c2749.35,2868.77) 2734.6,2923.84 ; S9.2@2693.84,2881.76 cw(c2749.35,2868.77) 2734.6,2923.84 ; S9.2@2697.11,2914.63 ccw(c2714.97,2945.57) 2724.22,2911.06 ; S9.2@2697.11,2914.63 ccw(c2714.97,2945.57) 2724.22,2911.06 ; S9.2@2697.11,2914.63 ccw(c2714.97,2945.57) 2724.22,2911.06 ; S9.2@2697.11,2914.63 ccw(c2714.97,2945.57) 2724.22,2911.06 ; S9.2@2697.11,2914.63 ccw(c2714.97,2945.57) 2724.22,2911.06 ; S9.2@2697.11,2914.63 ccw(c2714.97,2945.57) 2724.22,2911.06 ; S9.2@2698.69,2925.07 ccw(c2702.74,2933.75) 2709.92,2927.42 ; S9.2@2698.69,2925.07 ccw(c2702.74,2933.75) 2709.92,2927.42 ; S9.2@2698.69,2925.07 ccw(c2702.74,2933.75) 2709.92,2927.42 ; S9.2@2698.69,2925.07 ccw(c2702.74,2933.75) 2709.92,2927.42 ; S9.2@2702.11,2923.29 ccw(c2715.55,2946.58) 2722.51,2920.6 ; S9.2@2702.11,2923.29 ccw(c2715.55,2946.58) 2722.51,2920.6 ; S9.2@2702.11,2923.29 ccw(c2715.55,2946.58) 2722.51,2920.6 ; S9.2@2702.11,2923.29 ccw(c2715.55,2946.58) 2722.51,2920.6 ; S9.2@2702.11,2923.29 ccw(c2715.55,2946.58) 2722.51,2920.6 ; S9.2@2702.11,2923.29 ccw(c2715.55,2946.58) 2722.51,2920.6 ; S9.2@2704.16,2883.36 cw(c2735.98,2881.19) 2727.73,2912 ; S9.2@2704.16,2883.36 cw(c2735.98,2881.19) 2727.73,2912 ; S9.2@2704.16,2883.36 cw(c2735.98,2881.19) 2727.73,2912 ; S9.2@2704.16,2883.36 cw(c2735.98,2881.19) 2727.73,2912 ; S9.2@2704.16,2883.36 cw(c2735.98,2881.19) 2727.73,2912 ; S9.2@2704.16,2883.36 cw(c2735.98,2881.19) 2727.73,2912 ; 2709.92,2927.42 ccw(c2715.5,2922.51) S9.2@2710.39,2917.11 ; 2709.92,2927.42 ccw(c2715.5,2922.51) S9.2@2710.39,2917.11 ; 2709.92,2927.42 ccw(c2715.5,2922.51) S9.2@2710.39,2917.11 ; 2709.92,2927.42 ccw(c2715.5,2922.51) S9.2@2710.39,2917.11 ; S9.2@2724.21,2885 cw(c2761.68,2885) 2735.19,2911.49 ; S9.2@2724.21,2885 cw(c2761.68,2885) 2735.19,2911.49 ; S9.2@2724.21,2885 cw(c2761.68,2885) 2735.19,2911.49 ; S9.2@2724.21,2885 cw(c2761.68,2885) 2735.19,2911.49
KEY_9: S10.2 STM32F103ZET6.15 | length 5607
  Top Layer w10: STM32F103ZET6.15@4375,3601.1 5393.9,3601.1 5480,3515 5780,3515 6165,3900 S10.2@6165,4300 ; STM32F103ZET6.15@4396,3601.1 4432,3601.1 ; STM32F103ZET6.15@4396,3601.1 4432,3601.1 ; STM32F103ZET6.15@4396,3601.1 4432,3601.1 ; S10.2@6133.74,4268.74 cw(c6058.26,4193.26) 6165,4193.26 ; S10.2@6133.74,4268.74 cw(c6058.26,4193.26) 6165,4193.26 ; S10.2@6133.74,4268.74 cw(c6058.26,4193.26) 6165,4193.26 ; S10.2@6133.74,4268.74 cw(c6058.26,4193.26) 6165,4193.26 ; S10.2@6133.74,4268.74 cw(c6058.26,4193.26) 6165,4193.26 ; S10.2@6133.74,4268.74 cw(c6058.26,4193.26) 6165,4193.26 ; S10.2@6133.74,4268.74 cw(c6058.26,4193.26) 6165,4193.26 ; S10.2@6133.74,4268.74 cw(c6058.26,4193.26) 6165,4193.26 ; S10.2@6140.81,4275.81 cw(c6082.4,4217.4) 6165,4217.4 ; S10.2@6140.81,4275.81 cw(c6082.4,4217.4) 6165,4217.4 ; S10.2@6140.81,4275.81 cw(c6082.4,4217.4) 6165,4217.4 ; S10.2@6140.81,4275.81 cw(c6082.4,4217.4) 6165,4217.4 ; S10.2@6140.81,4275.81 cw(c6082.4,4217.4) 6165,4217.4 ; S10.2@6140.81,4275.81 cw(c6082.4,4217.4) 6165,4217.4 ; S10.2@6140.81,4275.81 cw(c6082.4,4217.4) 6165,4217.4 ; S10.2@6140.81,4275.81 cw(c6082.4,4217.4) 6165,4217.4 ; S10.2@6147.88,4282.88 cw(c6106.55,4241.55) 6165,4241.55 ; S10.2@6147.88,4282.88 cw(c6106.55,4241.55) 6165,4241.55 ; S10.2@6147.88,4282.88 cw(c6106.55,4241.55) 6165,4241.55 ; S10.2@6147.88,4282.88 cw(c6106.55,4241.55) 6165,4241.55 ; S10.2@6147.88,4282.88 cw(c6106.55,4241.55) 6165,4241.55 ; S10.2@6147.88,4282.88 cw(c6106.55,4241.55) 6165,4241.55 ; S10.2@6147.88,4282.88 cw(c6106.55,4241.55) 6165,4241.55 ; S10.2@6147.88,4282.88 cw(c6106.55,4241.55) 6165,4241.55 ; 6165,4193.26 cw(c6271.74,4193.26) S10.2@6196.26,4268.74 ; 6165,4193.26 cw(c6271.74,4193.26) S10.2@6196.26,4268.74 ; 6165,4193.26 cw(c6271.74,4193.26) S10.2@6196.26,4268.74 ; 6165,4193.26 cw(c6271.74,4193.26) S10.2@6196.26,4268.74 ; 6165,4193.26 cw(c6271.74,4193.26) S10.2@6196.26,4268.74 ; 6165,4193.26 cw(c6271.74,4193.26) S10.2@6196.26,4268.74 ; 6165,4193.26 cw(c6271.74,4193.26) S10.2@6196.26,4268.74 ; 6165,4193.26 cw(c6271.74,4193.26) S10.2@6196.26,4268.74 ; 6165,4217.4 cw(c6247.6,4217.4) S10.2@6189.19,4275.81 ; 6165,4217.4 cw(c6247.6,4217.4) S10.2@6189.19,4275.81 ; 6165,4217.4 cw(c6247.6,4217.4) S10.2@6189.19,4275.81 ; 6165,4217.4 cw(c6247.6,4217.4) S10.2@6189.19,4275.81 ; 6165,4217.4 cw(c6247.6,4217.4) S10.2@6189.19,4275.81 ; 6165,4217.4 cw(c6247.6,4217.4) S10.2@6189.19,4275.81 ; 6165,4217.4 cw(c6247.6,4217.4) S10.2@6189.19,4275.81 ; 6165,4217.4 cw(c6247.6,4217.4) S10.2@6189.19,4275.81 ; 6165,4241.55 cw(c6223.45,4241.55) S10.2@6182.12,4282.88 ; 6165,4241.55 cw(c6223.45,4241.55) S10.2@6182.12,4282.88 ; 6165,4241.55 cw(c6223.45,4241.55) S10.2@6182.12,4282.88 ; 6165,4241.55 cw(c6223.45,4241.55) S10.2@6182.12,4282.88 ; 6165,4241.55 cw(c6223.45,4241.55) S10.2@6182.12,4282.88 ; 6165,4241.55 cw(c6223.45,4241.55) S10.2@6182.12,4282.88 ; 6165,4241.55 cw(c6223.45,4241.55) S10.2@6182.12,4282.88 ; 6165,4241.55 cw(c6223.45,4241.55) S10.2@6182.12,4282.88
KEY_10: S11.2 STM32F103ZET6.14 | length 6036.1
  Top Layer w10: STM32F103ZET6.14@4375,3581.42 5373.58,3581.42 5460,3495 5825,3495 6630,4300 S11.2@6820,4300 ; STM32F103ZET6.14@4396,3581.42 4432,3581.42 ; STM32F103ZET6.14@4396,3581.42 4432,3581.42 ; STM32F103ZET6.14@4396,3581.42 4432,3581.42 ; 6713.26,4300 cw(c6713.26,4193.26) S11.2@6788.74,4268.74 ; 6713.26,4300 ccw(c6713.26,4406.74) S11.2@6788.74,4331.26 ; 6713.26,4300 ccw(c6713.26,4406.74) S11.2@6788.74,4331.26 ; 6713.26,4300 cw(c6713.26,4193.26) S11.2@6788.74,4268.74 ; 6713.26,4300 ccw(c6713.26,4406.74) S11.2@6788.74,4331.26 ; 6713.26,4300 cw(c6713.26,4193.26) S11.2@6788.74,4268.74 ; 6713.26,4300 ccw(c6713.26,4406.74) S11.2@6788.74,4331.26 ; 6713.26,4300 cw(c6713.26,4193.26) S11.2@6788.74,4268.74 ; 6713.26,4300 ccw(c6713.26,4406.74) S11.2@6788.74,4331.26 ; 6713.26,4300 cw(c6713.26,4193.26) S11.2@6788.74,4268.74 ; 6713.26,4300 ccw(c6713.26,4406.74) S11.2@6788.74,4331.26 ; 6713.26,4300 cw(c6713.26,4193.26) S11.2@6788.74,4268.74 ; 6713.26,4300 ccw(c6713.26,4406.74) S11.2@6788.74,4331.26 ; 6713.26,4300 cw(c6713.26,4193.26) S11.2@6788.74,4268.74 ; 6713.26,4300 ccw(c6713.26,4406.74) S11.2@6788.74,4331.26 ; 6713.26,4300 cw(c6713.26,4193.26) S11.2@6788.74,4268.74 ; 6737.4,4300 cw(c6737.4,4217.4) S11.2@6795.81,4275.81 ; 6737.4,4300 ccw(c6737.4,4382.6) S11.2@6795.81,4324.19 ; 6737.4,4300 ccw(c6737.4,4382.6) S11.2@6795.81,4324.19 ; 6737.4,4300 cw(c6737.4,4217.4) S11.2@6795.81,4275.81 ; 6737.4,4300 ccw(c6737.4,4382.6) S11.2@6795.81,4324.19 ; 6737.4,4300 cw(c6737.4,4217.4) S11.2@6795.81,4275.81 ; 6737.4,4300 ccw(c6737.4,4382.6) S11.2@6795.81,4324.19 ; 6737.4,4300 cw(c6737.4,4217.4) S11.2@6795.81,4275.81 ; 6737.4,4300 ccw(c6737.4,4382.6) S11.2@6795.81,4324.19 ; 6737.4,4300 cw(c6737.4,4217.4) S11.2@6795.81,4275.81 ; 6737.4,4300 ccw(c6737.4,4382.6) S11.2@6795.81,4324.19 ; 6737.4,4300 cw(c6737.4,4217.4) S11.2@6795.81,4275.81 ; 6737.4,4300 ccw(c6737.4,4382.6) S11.2@6795.81,4324.19 ; 6737.4,4300 cw(c6737.4,4217.4) S11.2@6795.81,4275.81 ; 6737.4,4300 ccw(c6737.4,4382.6) S11.2@6795.81,4324.19 ; 6737.4,4300 cw(c6737.4,4217.4) S11.2@6795.81,4275.81 ; 6761.55,4300 cw(c6761.55,4241.55) S11.2@6802.88,4282.88 ; 6761.55,4300 ccw(c6761.55,4358.45) S11.2@6802.88,4317.12 ; 6761.55,4300 ccw(c6761.55,4358.45) S11.2@6802.88,4317.12 ; 6761.55,4300 cw(c6761.55,4241.55) S11.2@6802.88,4282.88 ; 6761.55,4300 ccw(c6761.55,4358.45) S11.2@6802.88,4317.12 ; 6761.55,4300 cw(c6761.55,4241.55) S11.2@6802.88,4282.88 ; 6761.55,4300 ccw(c6761.55,4358.45) S11.2@6802.88,4317.12 ; 6761.55,4300 cw(c6761.55,4241.55) S11.2@6802.88,4282.88 ; 6761.55,4300 ccw(c6761.55,4358.45) S11.2@6802.88,4317.12 ; 6761.55,4300 cw(c6761.55,4241.55) S11.2@6802.88,4282.88 ; 6761.55,4300 ccw(c6761.55,4358.45) S11.2@6802.88,4317.12 ; 6761.55,4300 cw(c6761.55,4241.55) S11.2@6802.88,4282.88 ; 6761.55,4300 ccw(c6761.55,4358.45) S11.2@6802.88,4317.12 ; 6761.55,4300 cw(c6761.55,4241.55) S11.2@6802.88,4282.88 ; 6761.55,4300 ccw(c6761.55,4358.45) S11.2@6802.88,4317.12 ; 6761.55,4300 cw(c6761.55,4241.55) S11.2@6802.88,4282.88